# Altium PCB EMIA_HM1521_NETLIST_V1.0.pcbdoc (part 2 of 2)
Units mm, origin at the board's own origin, x right, y up, seen from the top; angles counter-clockwise.
Board outline 118 x 84.09 mm, 2 copper layers (Top Layer, Bottom Layer), stack 0.972 mm thick; 201 components, 147 nets, 642 pads, 379 vias.
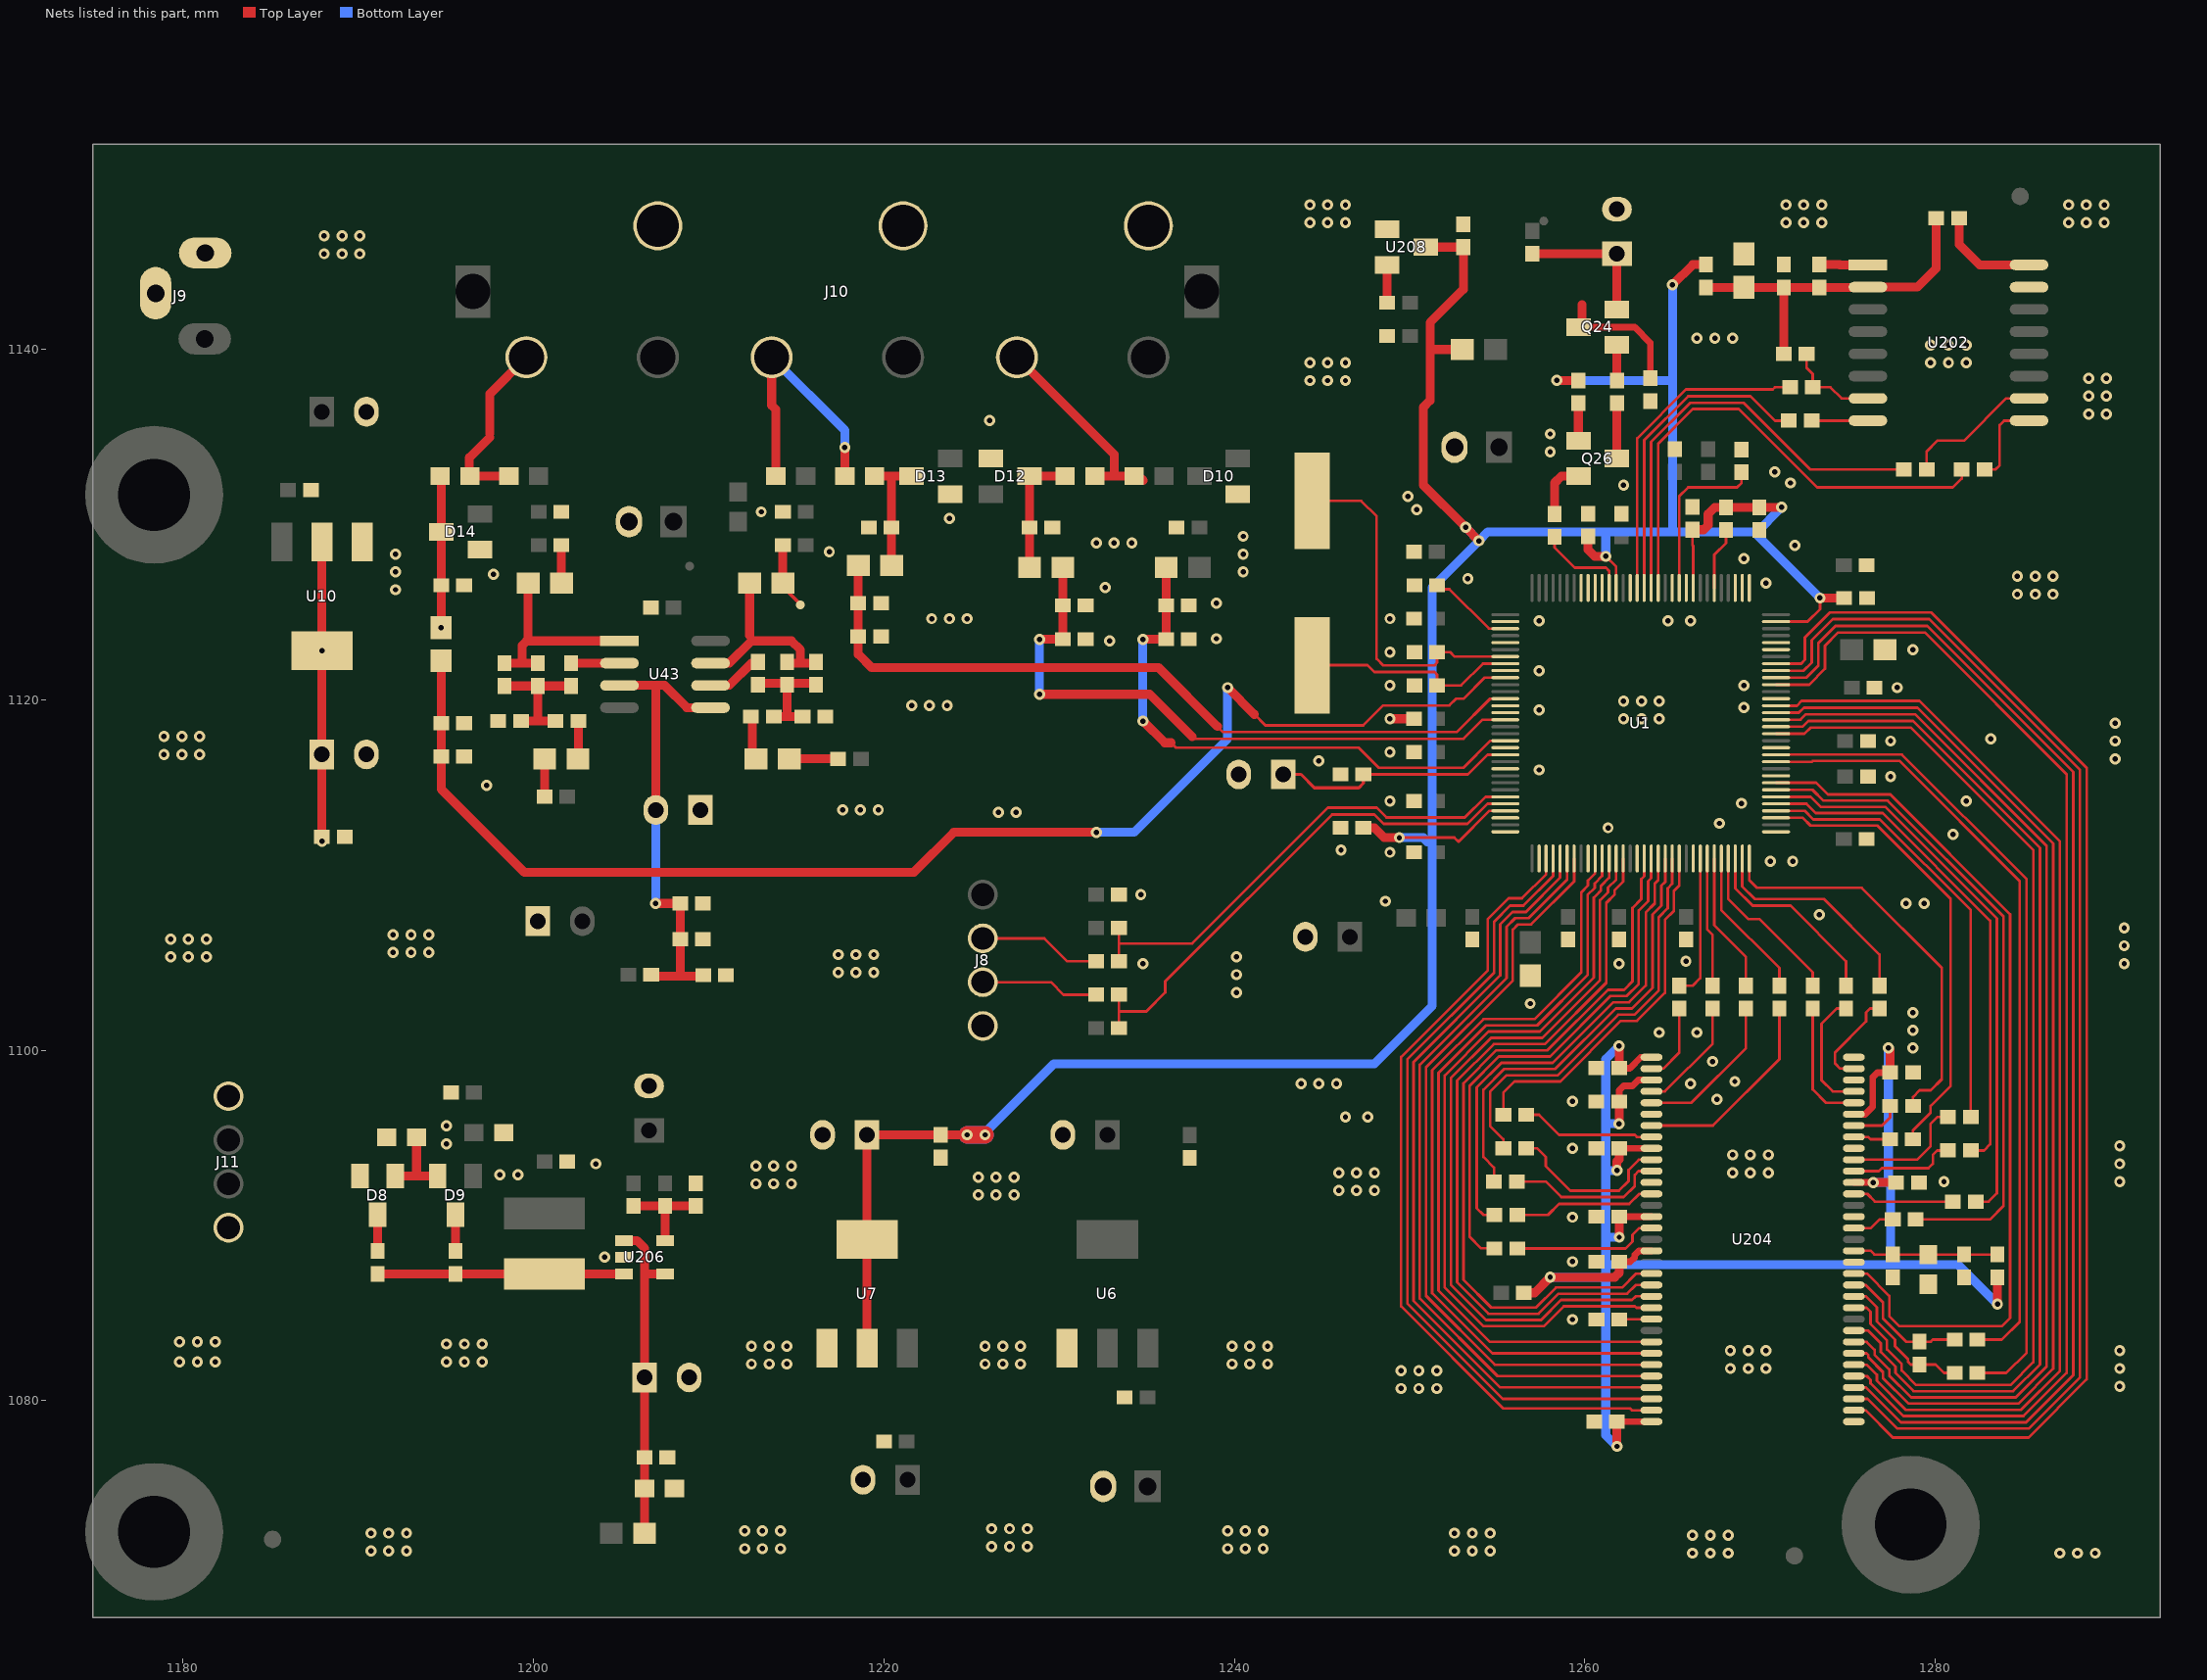
[diagram p2: the nets of this part, all layers, seen from the top]

## Via types
v1: diameter 0.635, hole 0.305, Top Layer to Bottom Layer, 379 vias

## Nets (pads, with @x,y where several pads share a name; then routed paths per layer and width w, separated by ;. In a path a pad name is that pad's centre, name@x,y a point inside that pad or via, vN(x,y) a via of type N, cw(c..) or ccw(c..) an arc to the next point about the centre after c; other vN are vias at no path point) (continued)
D3V3: C30.2 C35.2 C37.2 C40.2 C46.2 C59.2 C76.1 C98.1 L8.1 L17.1 R65.2 R139.2 U1.63 U1.73 U1.84 U1.125 U7.2 U7.4 U208.3 | length 178.2
  Top Layer w0.152: v1(1249.418,1112.136) 1252.557,1112.136 1252.791,1111.902 1254.554,1113.665 U1.125@1255.47,1113.665 ; v1(1261.204,1128.189) 1261.795,1127.598 U1.84@1261.795,1126.39 ; C35.2@1266.157,1129.708 1266.157,1128.824 1266.195,1128.786 U1.73@1266.195,1126.39 ; U1.63@1270.92,1124.465 1272.72,1124.465 1273.431,1125.177 v1(1273.431,1125.812)
  Top Layer w0.508: U7.2@1219.04,1082.975 C98.1@1219.04,1095.169 C76.1@1223.231,1095.169 v1(1224.755,1095.169) ; C46.2@1247.619,1112.695 1247.996,1112.695 1248.554,1112.136 v1(1249.418,1112.136) ; U208.3@1251.173,1145.842 C59.2@1253.076,1145.842 1253.076,1143.429 1251.171,1141.524 1251.171,1140 ; L17.1@1252.822,1140 1251.171,1140 ; v1(1253.965,1129.078) v1(1253.203,1129.84) 1250.79,1132.253 1250.79,1136.698 1251.171,1137.079 1251.171,1140 ; v1(1258.4,1138.227) R139.2@1259.639,1138.227 ; C30.2@1260.188,1129.327 1260.188,1128.57 1260.569,1128.189 v1(1261.204,1128.189) ; v1(1265.014,1143.683) 1266.174,1144.843 L8.1@1266.919,1144.843 ; C35.2@1266.157,1129.708 1266.787,1129.708 1267.046,1129.967 1267.046,1130.602 1267.431,1130.988 R65.2@1268.062,1130.988 C40.2@1269.967,1130.988 v1(1271.241,1130.988) ; v1(1273.431,1125.812) C37.2@1274.809,1125.812 C37.2@1274.877,1125.812
  Top Layer w1.016: v1(1224.755,1095.169) v1(1225.771,1095.169)
  Bottom Layer w0.178: 1261.29,1129.545 1261.331,1129.586
  Bottom Layer w0.508: v1@1225.644,1095.169 1229.708,1099.233 1247.996,1099.233 1251.298,1102.535 1251.298,1112.187 ; v1(1249.418,1112.136) 1250.779,1112.136 1251.013,1111.902 1251.298,1112.187 ; v1(1253.203,1129.84) v1(1253.965,1129.078) ; v1(1258.4,1138.227) 1265.014,1138.227 ; v1(1261.204,1128.189) 1261.204,1129.586 ; v1(1265.014,1143.683) 1265.014,1138.227 ; 1269.657,1129.586 1265.014,1129.586 ; v1(1271.241,1130.988) 1269.748,1129.495 v1(1273.431,1125.812) ; 1251.298,1112.187 1251.298,1126.411 v1(1253.965,1129.078) ; v1(1253.965,1129.078) 1254.473,1129.586 1261.204,1129.586 ; 1261.204,1129.586 1261.331,1129.586 1265.014,1129.586 ; 1265.014,1129.586 1265.014,1138.227
  Bottom Layer w1.016: v1(1224.755,1095.169) 1225.644,1095.169 v1(1225.771,1095.169)
D3V3_T: C83.1 C104.1 U10.2 U10.4 | length 16.8
  Top Layer w0.508: C83.1@1187.925,1112.187 U10.2@1187.925,1128.953
  other v1: 1187.925,1111.933 1187.925,1122.803
DDR_A0: U1.6 U204.29 | length 44.1
  Top Layer w0.152: U1.6@1258.995,1110.94 1258.995,1109.74 1256.794,1107.539 1256.032,1107.539 1255.539,1107.046 1255.539,1104.125 1250.586,1099.172 1250.586,1085.837 1255.023,1081.4 U204.29@1263.811,1081.4
DDR_A1: U1.5 U204.30 | length 44.8
  Top Layer w0.152: U1.5@1258.595,1110.94 1258.595,1109.842 1256.647,1107.894 1255.885,1107.894 1255.184,1107.193 1255.184,1104.272 1250.231,1099.319 1250.231,1085.69 1255.171,1080.75 U204.30@1263.811,1080.75
DDR_A2: U1.4 U204.31 | length 45.5
  Top Layer w0.152: U1.4@1258.195,1110.94 1258.195,1109.945 1256.5,1108.25 1255.738,1108.25 1254.828,1107.341 1254.828,1104.42 1249.875,1099.467 1249.875,1085.542 1255.318,1080.1 U204.31@1263.811,1080.1
DDR_A3: U1.3 U204.32 | length 46.2
  Top Layer w0.152: U1.3@1257.795,1110.94 1257.795,1110.048 1256.417,1108.671 1255.655,1108.671 1254.473,1107.488 1254.473,1104.567 1249.52,1099.614 1249.52,1085.39 1255.362,1079.548 1262.601,1079.548 1262.699,1079.45 U204.32@1263.811,1079.45
DDR_A4: U1.57 U204.35 | length 73.6
  Top Layer w0.152: U1.57@1270.92,1122.065 1272.356,1122.065 1272.573,1122.282 1272.573,1123.558 1274,1124.984 1279.79,1124.984 1288.65,1116.124 1288.65,1081.213 1285.334,1077.897 1277.587,1077.897 1276.034,1079.45 U204.35@1275.361,1079.45
DDR_A5: U1.56 U204.36 | length 72.4
  Top Layer w0.152: U1.56@1270.92,1121.665 1272.495,1121.665 1272.954,1122.124 1272.954,1123.4 1274.158,1124.603 1279.668,1124.603 1288.269,1116.002 1288.269,1081.335 1285.339,1078.405 1277.841,1078.405 1276.146,1080.1 U204.36@1275.361,1080.1
DDR_A6: U1.55 U204.37 | length 71.3
  Top Layer w0.152: U1.55@1270.92,1121.265 1272.656,1121.265 1273.335,1121.944 1273.335,1123.242 1274.315,1124.222 1279.546,1124.222 1287.888,1115.88 1287.888,1081.457 1285.191,1078.761 1278.041,1078.761 1276.051,1080.75 U204.37@1275.361,1080.75
DDR_A7: U1.54 U204.38 | length 70.3
  Top Layer w0.152: U1.54@1270.92,1120.865 1272.807,1120.865 1273.716,1121.774 1273.716,1123.084 1274.473,1123.841 1279.424,1123.841 1287.507,1115.758 1287.507,1081.579 1285.044,1079.116 1278.188,1079.116 1276.317,1080.988 1276.317,1081.188 1276.105,1081.4 U204.38@1275.361,1081.4
DDR_A8: U1.51 U204.39 | length 63.8
  Top Layer w0.152: U1.51@1270.92,1119.665 1272.111,1119.665 1272.38,1119.934 1279.111,1119.934 1287.126,1111.919 1287.126,1081.701 1284.897,1079.472 1278.335,1079.472 1276.672,1081.135 1276.672,1081.478 1276.101,1082.05 U204.39@1275.361,1082.05
DDR_A9: U1.50 U204.40 | length 62.8
  Top Layer w0.152: U1.50@1270.92,1119.265 1272.219,1119.265 1272.507,1119.553 1278.989,1119.553 1286.745,1111.797 1286.745,1081.823 1284.75,1079.827 1278.483,1079.827 1277.028,1081.282 1277.028,1081.626 1276.19,1082.464 1276.19,1082.596 1276.086,1082.7 U204.40@1275.361,1082.7
DDR_A10: U1.7 U204.28 | length 43.4
  Top Layer w0.152: U1.7@1259.395,1110.94 1259.395,1109.636 1256.941,1107.183 1256.2,1107.183 1255.895,1106.878 1255.895,1103.978 1250.942,1099.025 1250.942,1085.984 1254.876,1082.05 U204.28@1263.811,1082.05
DDR_A11: U1.49 U204.41 | length 61.5
  Top Layer w0.152: U1.49@1271.195,1118.865 1272.321,1118.865 1272.629,1119.172 1278.867,1119.172 1286.364,1111.675 1286.364,1081.945 1284.602,1080.183 1278.63,1080.183 1277.383,1081.43 1277.383,1081.773 1276.545,1082.611 1276.545,1082.895 1276.09,1083.35 U204.41@1275.361,1083.35
DDR_A12: U1.48 U204.42 | length 60.9
  Top Layer w0.152: U1.48@1270.92,1118.465 1272.435,1118.465 1272.761,1118.791 1278.745,1118.791 1285.983,1111.553 1285.983,1082.066 1284.455,1080.539 1278.777,1080.539 1277.739,1081.577 1277.739,1081.936 1276.901,1082.774 1276.901,1083.272 1276.173,1084 U204.42@1275.361,1084
DDR_BA0: U1.11 U204.26 | length 43.6
  Top Layer w0.152: U1.11@1260.995,1110.94 1260.995,1109.946 1260.569,1109.52 1260.569,1109.266 1260.162,1108.86 1260.162,1104.293 1257.287,1101.417 1254.366,1101.417 1251.653,1098.705 1251.653,1086.279 1254.582,1083.35 U204.26@1263.811,1083.35
DDR_BA1: U1.10 U204.27 | length 44.3
  Top Layer w0.152: U1.10@1260.595,1110.94 1260.595,1110.092 1260.188,1109.685 1260.188,1109.393 1259.807,1109.012 1259.807,1104.44 1257.14,1101.773 1254.219,1101.773 1251.298,1098.852 1251.298,1086.132 1254.729,1082.7 U204.27@1263.811,1082.7
DDR_CAS: U1.13 U204.22 | length 42.8
  Top Layer w0.152: U1.13@1261.795,1110.94 1261.795,1109.74 1261.331,1109.276 1261.331,1109.012 1260.873,1108.555 1260.873,1103.998 1257.582,1100.706 1254.661,1100.706 1252.364,1098.41 1252.364,1086.604 1254.366,1084.603 1257.512,1084.603 1258.655,1085.746 1262.702,1085.746 1262.907,1085.95 U204.22@1263.811,1085.95
DDR_CKE: U1.47 U204.44 | length 60.5
  Top Layer w0.152: U1.47@1270.92,1118.065 1272.543,1118.065 1272.888,1118.41 1278.623,1118.41 1285.602,1111.431 1285.602,1082.188 1284.308,1080.894 1278.925,1080.894 1278.095,1081.724 1278.095,1082.083 1277.256,1082.921 1277.256,1083.434 1276.317,1084.374 1276.317,1085.074 1276.09,1085.3 U204.44@1275.361,1085.3
DDR_CKN: R98.2 U1.43 | length 44.7
  Top Layer w0.152: U1.43@1270.92,1116.465 1272.975,1116.465 1273.027,1116.518 1277.955,1116.518 1284.826,1109.647 1284.826,1084.501 1283.81,1083.485 R98.2@1282.417,1083.485
DDR_CKP: R99.2 U1.44 | length 47.3
  Top Layer w0.152: U1.44@1271.195,1116.865 1271.203,1116.873 1278.107,1116.873 1285.221,1109.76 1285.221,1082.737 1284.064,1081.58 R99.2@1282.417,1081.58
DDR_D0: R68.2 U1.25 | length 8.2
  Top Layer w0.152: R68.2@1265.395,1103.683 1266.161,1103.683 1266.595,1104.116 U1.25@1266.595,1110.94
DDR_D1: R69.2 U1.26 | length 7.4
  Top Layer w0.152: U1.26@1266.995,1110.94 1266.995,1106.891 1267.3,1106.587 R69.2@1267.3,1103.683
DDR_D2: R70.2 U1.27 | length 8
  Top Layer w0.152: U1.27@1267.395,1110.94 1267.395,1107.139 1269.205,1105.329 R70.2@1269.205,1103.683
DDR_D3: R71.2 U1.28 | length 8.6
  Top Layer w0.152: U1.28@1267.795,1110.94 1267.795,1108.009 1271.11,1104.694 R71.2@1271.11,1103.683
DDR_D4: R67.2 U1.22 | length 20.9
  Top Layer w0.152: R67.2@1255.357,1096.312 1255.357,1097.577 1255.997,1098.217 1258.613,1098.217 1262.067,1101.672 1262.982,1101.672 1264.582,1103.272 1264.582,1107.447 1265.09,1107.955 1265.09,1109.088 1265.395,1109.393 U1.22@1265.395,1110.94
DDR_D5: R66.2 U1.21 | length 23.4
  Top Layer w0.152: R66.2@1255.357,1094.407 1255.357,1094.92 1254.6,1095.677 1254.6,1097.628 1255.544,1098.573 1258.465,1098.573 1261.92,1102.027 1262.834,1102.027 1264.226,1103.419 1264.226,1107.595 1264.734,1108.103 1264.734,1109.241 1264.995,1109.501 U1.21@1264.995,1110.94
DDR_D6: R62.2 U1.20 | length 25.2
  Top Layer w0.152: R62.2@1254.824,1092.502 1254.824,1093.294 1254.219,1093.899 1254.219,1097.75 1255.397,1098.928 1258.318,1098.928 1261.773,1102.383 1262.687,1102.383 1263.871,1103.566 1263.871,1107.742 1264.379,1108.25 1264.379,1109.393 1264.594,1109.608 1264.594,1110.939 U1.20@1264.595,1110.94
DDR_D7: R56.2 U1.19 | length 27.7
  Top Layer w0.152: R56.2@1254.849,1090.597 1254.219,1090.597 1253.838,1090.978 1253.838,1097.872 1255.25,1099.284 1258.171,1099.284 1261.625,1102.738 1262.54,1102.738 1263.49,1103.688 1263.49,1107.869 1263.998,1108.377 1263.998,1109.52 1264.195,1109.717 U1.19@1264.195,1110.94
DDR_D8: R79.2 U1.38 | length 32.6
  Top Layer w0.152: U1.38@1270.92,1114.465 1272.896,1114.465 1273.472,1113.889 1277.15,1113.889 1283.522,1107.516 1283.522,1091.834 1283.048,1091.359 R79.2@1282.316,1091.359
DDR_D9: R78.2 U1.37 | length 29
  Top Layer w0.152: U1.37@1270.92,1114.065 1272.661,1114.065 1273.192,1113.533 1277.002,1113.533 1283.145,1107.391 1283.145,1094.631 1282.794,1094.28 R78.2@1282.036,1094.28
DDR_D10: R77.2 U1.36 | length 25.3
  Top Layer w0.152: U1.36@1270.92,1113.665 1272.553,1113.665 1273.04,1113.178 1276.85,1113.178 1282.036,1107.991 R77.2@1282.036,1096.185
DDR_D11: R76.2 U1.35 | length 26.5
  Top Layer w0.152: U1.35@1270.92,1113.265 1272.445,1113.265 1272.888,1112.822 1276.698,1112.822 1280.889,1108.631 1280.889,1097.963 1279.746,1096.82 1279.746,1096.439 1278.73,1095.423 R76.2@1278.73,1094.915
DDR_D12: R75.2 U1.32 | length 23.2
  Top Layer w0.152: U1.32@1269.395,1110.94 1269.395,1109.711 1269.84,1109.266 1275.809,1109.266 1280.381,1104.694 1280.381,1098.344 1279.746,1097.709 1279.111,1097.709 1278.734,1097.333 R75.2@1278.734,1096.82
DDR_D13: R72.2 U1.29 | length 9.6
  Top Layer w0.152: U1.29@1268.195,1110.94 1268.195,1108.625 1269.332,1107.488 1269.967,1107.488 1273.015,1104.44 R72.2@1273.015,1103.683
DDR_D14: R73.2 U1.30 | length 11.1
  Top Layer w0.152: U1.30@1268.595,1110.94 1268.595,1109.241 1269.588,1108.248 1271.747,1108.248 1274.92,1105.075 R73.2@1274.92,1103.683
DDR_D15: R74.2 U1.31 | length 12.8
  Top Layer w0.152: U1.31@1268.995,1110.94 1268.995,1109.349 1269.713,1108.631 1273.65,1108.631 1276.825,1105.456 R74.2@1276.825,1103.683
DDR_DM0: U1.17 U204.20 | length 42.8
  Top Layer w0.152: U1.17@1263.395,1110.94 1263.395,1109.933 1263.236,1109.774 1263.236,1108.631 1262.728,1108.123 1262.728,1103.932 1262.245,1103.45 1261.331,1103.45 1257.876,1099.995 1254.955,1099.995 1253.076,1098.116 1253.076,1086.899 1254.661,1085.314 1257.217,1085.314 1258.36,1086.457 1262.143,1086.457 1262.937,1087.25 U204.20@1263.811,1087.25
DDR_DM1: U1.40 U204.47 | length 50.6
  Top Layer w0.152: U1.40@1270.92,1115.265 1273.212,1115.265 1273.877,1114.6 1277.444,1114.6 1284.284,1107.76 1284.284,1084.722 1283.81,1084.247 1277.957,1084.247 1277.383,1084.821 1277.383,1085.974 1276.108,1087.25 U204.47@1275.361,1087.25
DDR_DQS0: R100.2 U1.18 | length 29.5
  Top Layer w0.152: R100.2@1254.849,1088.692 1254.092,1088.692 1253.431,1089.352 1253.431,1097.968 1255.102,1099.639 1258.023,1099.639 1261.478,1103.094 1262.392,1103.094 1263.083,1103.785 1263.083,1107.976 1263.617,1108.509 1263.617,1109.647 1263.795,1109.825 U1.18@1263.795,1110.665
DDR_DQS1: R55.2 U1.39 | length 37.8
  Top Layer w0.152: U1.39@1270.92,1114.865 1272.999,1114.865 1273.619,1114.244 1277.297,1114.244 1283.903,1107.638 1283.903,1091.105 1283.141,1090.343 R55.2@1278.887,1090.343
DDR_RAS: U1.12 U204.23 | length 43.3
  Top Layer w0.152: U1.12@1261.395,1110.94 1261.395,1109.843 1260.924,1109.373 1260.924,1109.119 1260.823,1109.017 1260.823,1109.012 1260.518,1108.707 1260.518,1104.145 1257.434,1101.062 1254.513,1101.062 1252.009,1098.557 1252.009,1086.457 1254.219,1084.247 1257.659,1084.247 1258.802,1085.39 1262.855,1085.39 1262.945,1085.3 U204.23@1263.811,1085.3
DDR_WE: U1.14 U204.21 | length 42.3
  Top Layer w0.152: U1.14@1262.195,1110.94 1262.195,1109.622 1261.712,1109.139 1261.712,1108.89 1261.229,1108.408 1261.229,1103.851 1257.729,1100.351 1254.808,1100.351 1252.72,1098.263 1252.72,1086.751 1254.513,1084.958 1257.365,1084.958 1258.508,1086.101 1262.423,1086.101 1262.922,1086.6 U204.21@1263.811,1086.6
DR_CKN: R98.1 R109.2 U204.46 | length 7.7
  Top Layer w0.152: U204.46@1275.361,1086.6 1276.043,1086.6 1277.028,1085.615 1277.028,1084.674 1278.339,1083.363 R109.2@1279.111,1083.363 1279.75,1083.363 1279.873,1083.485 R98.1@1281.117,1083.485
DR_CKP: R99.1 R109.1 U204.45 | length 8.4
  Top Layer w0.152: U204.45@1275.361,1085.95 1276.053,1085.95 1276.672,1085.331 1276.672,1084.526 1277.714,1083.485 1277.714,1083.104 1278.45,1082.367 1278.45,1082.215 1278.603,1082.063 R109.1@1279.111,1082.063 1280.025,1082.063 1280.508,1081.58 R99.1@1281.117,1081.58
DR_D0: R68.1 U204.2 | length 4.5
  Top Layer w0.152: U204.2@1263.811,1098.95 1264.477,1098.95 1265.395,1099.868 R68.1@1265.395,1102.383
DR_D1: R69.1 U204.4 | length 6.6
  Top Layer w0.152: U204.4@1263.811,1097.65 1264.574,1097.65 1267.3,1100.376 R69.1@1267.3,1102.383
DR_D2: R70.1 U204.5 | length 9.2
  Top Layer w0.152: U204.5@1263.811,1097 1266.083,1097 1269.205,1100.122 R70.1@1269.205,1102.383 R70.1@1269.205,1102.674
DR_D3: R71.1 U204.7 | length 11.8
  Top Layer w0.152: U204.7@1263.811,1095.7 1267.323,1095.7 1271.11,1099.487 R71.1@1271.11,1102.383
DR_D4: R67.1 U204.8 | length 7.7
  Top Layer w0.152: R67.1@1256.657,1096.312 1257.394,1096.312 1258.537,1095.169 1262.855,1095.169 1262.974,1095.05 U204.8@1263.811,1095.05
DR_D5: R66.1 U204.10 | length 9.6
  Top Layer w0.152: R66.1@1256.657,1094.407 1257.267,1094.407 1257.775,1093.899 1257.775,1093.391 1259.184,1091.981 1261.953,1091.981 1262.499,1092.527 1262.499,1093.162 1263.087,1093.75 U204.10@1263.811,1093.75
DR_D6: R62.1 U204.11 | length 9
  Top Layer w0.152: R62.1@1256.124,1092.502 1257.775,1092.502 1258.664,1091.613 1262.22,1091.613 1262.855,1092.248 1262.855,1092.883 1263.072,1093.1 U204.11@1263.811,1093.1
DR_D7: R56.1 U204.13 | length 8.2
  Top Layer w0.152: R56.1@1256.149,1090.597 1257.902,1090.597 1258.537,1091.232 1262.541,1091.232 1263.109,1091.8 U204.13@1263.811,1091.8
DR_D8: R79.1 U204.54 | length 5.8
  Top Layer w0.152: U204.54@1275.361,1091.8 1276.13,1091.8 1276.571,1091.359 R79.1@1281.016,1091.359
DR_D9: R78.1 U204.56 | length 7.6
  Top Layer w0.152: R78.1@1280.736,1094.28 1280.127,1094.28 1279.873,1094.026 1279.873,1093.518 1279.619,1093.264 1276.952,1093.264 1276.788,1093.1 ; 1276.788,1093.1 U204.56@1275.361,1093.1 1276.788,1093.1
DR_D10: R77.1 U204.57 | length 7.1
  Top Layer w0.152: U204.57@1275.361,1093.75 1278.962,1093.75 1279.746,1094.534 1279.746,1095.804 1280.127,1096.185 R77.1@1280.736,1096.185
DR_D11: R76.1 U204.59 | length 2.1
  Top Layer w0.152: U204.59@1275.361,1095.05 1276.182,1095.05 1276.317,1094.915 R76.1@1277.43,1094.915
DR_D12: R75.1 U204.60 | length 2.9
  Top Layer w0.178: U204.60@1275.361,1095.7 1276.975,1095.7 1277.434,1096.16 R75.1@1277.434,1096.82
DR_D13: R72.1 U204.62 | length 7.3
  Top Layer w0.152: R72.1@1273.015,1102.383 1273.015,1097.762 1273.777,1097 U204.62@1275.361,1097
DR_D14: R73.1 U204.63 | length 7.1
  Top Layer w0.152: R73.1@1274.92,1102.383 1274.386,1102.383 1273.523,1101.519 1273.523,1098.285 1274.158,1097.65 U204.63@1275.361,1097.65
DR_D15: R74.1 U204.65 | length 5.7
  Top Layer w0.152: U204.65@1275.361,1098.95 1274.59,1098.95 1274.285,1099.255 1274.285,1099.868 1276.063,1101.646 1276.063,1102.154 1276.291,1102.383 R74.1@1276.825,1102.383
DR_DQS0: R100.1 U204.16 | length 8.4
  Top Layer w0.152: R100.1@1256.149,1088.679 1262.334,1088.679 1262.728,1089.073 1262.728,1089.454 1263.124,1089.85 U204.16@1263.811,1089.85
DR_DQS1: R55.1 U204.51 | length 2.4
  Top Layer w0.152: U204.51@1275.361,1089.85 1276.332,1089.85 1276.825,1090.343 R55.1@1277.587,1090.343
GND: C5.1 C6.1 C11.1 C13.2 C14.2 C15.1 C24.2 C25.2 C26.2 C27.2 C28.2 C29.1 C30.1 C31.1 C32.1 C33.1 C34.1 C35.1 C37.1 C38.1 C40.1 C41.1 C42.1 C43.1 C45.2 C46.1 C47.2 C49.2 C50.2 C53.1 C54.1 C55.1 C56.2 C57.1 C58.1 C59.1 C60.2 C61.1 C63.1 C64.1 C65.2 C67.1 C70.1 C71.2 C72.2 C73.1 C74.2 C75.1 C76.2 C78.2 C83.2 C84.1 C85.1 C86.1 C87.1 C88.1 C89.1 C90.1 C98.2 C99.2 C100.2 C101.2 C102.2 C104.2 C105.1 C107.1 C116.1 C117.1 C251.1 C270.2 C271.2 C273.1 C275.2 C276.2 C343.2 C1327.2 C1328.2 C1333.2 C1334.2 CE1.2 CE2.2 CE5.2 D8.2 D10.1 D12.1 D13.1 D14.1 J8.4 J9.2 J9.3 J10.3 J10.6 J10.9 J11.1 J11.4 R48.1 R54.1 R57.1 R59.1 R60.1 R64.2 R80.1 R83.2 R91.1 R117.1 R161.1 R181.1 R182.1 U1.2 U1.9 U1.16 U1.24 U1.33 U1.41 U1.45 U1.52 U1.65 U1.74 U1.76 U1.82 U1.98 U1.101 U1.105 U1.110 U1.111 U1.116 U1.119 U1.126 U1.128 U6.1 U7.1 U10.1 U202.15 U204.6 U204.12 U204.34 U204.48 U204.52 U204.58 U204.64 U204.66 U206.2 U208.1 | length 1.4
  Top Layer w0.508: v1(1248.885,1118.918) C57.1@1250.256,1118.918
  other v1: 1266.157,1071.293 1267.173,1071.293 1268.189,1071.293 1287.112,1071.293 1288.128,1071.293 1289.144,1071.293 1190.719,1071.42 1191.735,1071.42 1192.751,1071.42 1252.568,1071.42 1253.584,1071.42 1254.6,1071.42 1212.055,1071.547 1213.071,1071.547 1214.087,1071.547 1239.614,1071.547 1240.63,1071.547 1241.646,1071.547 1226.152,1071.674 1227.168,1071.674 1228.184,1071.674 1266.157,1072.309 1267.173,1072.309 1268.189,1072.309 1190.719,1072.436 1191.735,1072.436 1192.751,1072.436 1252.568,1072.436 1253.584,1072.436 1254.6,1072.436 1212.055,1072.563 1213.071,1072.563 1214.087,1072.563 1239.614,1072.563 1240.63,1072.563 1241.646,1072.563 1226.152,1072.69 1227.168,1072.69 1228.184,1072.69 1249.52,1080.691 1250.536,1080.691 1251.552,1080.691 1290.541,1080.818 1249.52,1081.707 1250.536,1081.707 1251.552,1081.707 1268.316,1081.834 1269.332,1081.834 1270.348,1081.834 1290.541,1081.834 1212.436,1082.088 1213.452,1082.088 1214.468,1082.088 1225.771,1082.088 1226.787,1082.088 1227.803,1082.088 1239.868,1082.088 1240.884,1082.088 1241.9,1082.088 1179.797,1082.215 1180.813,1082.215 1181.829,1082.215 1195.037,1082.215 1196.053,1082.215 1197.069,1082.215 1268.316,1082.85 1269.332,1082.85 1270.348,1082.85 1290.541,1082.85 1212.436,1083.104 1213.452,1083.104 1214.468,1083.104 1225.771,1083.104 1226.787,1083.104 1227.803,1083.104 1239.868,1083.104 1240.884,1083.104 1241.9,1083.104 1195.037,1083.231 1196.053,1083.231 1197.069,1083.231 1179.797,1083.358 1180.813,1083.358 1181.829,1083.358 1259.299,1084.628 1259.299,1087.93 1204.054,1088.184 1259.299,1090.47 1225.39,1091.74 1226.406,1091.74 1227.422,1091.74 1245.964,1091.994 1246.98,1091.994 1247.996,1091.994 1212.69,1092.375 1213.706,1092.375 1214.722,1092.375 1280.508,1092.502 1290.541,1092.502 1225.39,1092.756 1226.406,1092.756 1227.422,1092.756 1198.085,1092.883 1199.101,1092.883 1245.964,1093.01 1246.98,1093.01 1247.996,1093.01 1268.443,1093.01 1269.459,1093.01 1270.475,1093.01 1212.69,1093.391 1213.706,1093.391 1214.722,1093.391 1203.546,1093.518 1290.541,1093.518 1268.443,1094.026 1269.459,1094.026 1270.475,1094.026 1259.299,1094.407 1290.541,1094.534 1195.037,1094.661 1195.037,1095.677 1246.345,1096.185 1247.615,1096.185 1259.299,1097.074 1267.554,1097.201 1243.805,1098.09 1244.821,1098.09 1245.837,1098.09 1266.03,1098.09 1268.57,1098.217 1267.3,1099.36 1278.73,1100.122 1264.252,1101.011 1266.411,1101.011 1278.73,1101.138 1278.73,1102.154 1256.886,1102.662 1240.122,1103.297 1240.122,1104.313 1217.389,1104.44 1218.405,1104.44 1219.421,1104.44 1234.788,1104.948 1261.966,1104.948 1290.795,1104.948 1265.776,1105.075 1179.289,1105.329 1180.305,1105.329 1181.321,1105.329 1240.122,1105.329 1217.389,1105.456 1218.405,1105.456 1219.421,1105.456 1191.989,1105.583 1193.005,1105.583 1194.021,1105.583 1290.795,1105.964 1179.289,1106.345 1180.305,1106.345 1181.321,1106.345 1191.989,1106.599 1193.005,1106.599 1194.021,1106.599 1290.795,1106.98 1273.396,1107.742 1278.349,1108.377 1279.365,1108.377 1248.631,1108.504 1234.661,1108.885 1270.602,1110.79 1271.872,1110.79 1248.885,1111.298 1246.091,1111.425 1281.016,1112.314 1261.331,1112.695 1267.681,1112.949 1226.533,1113.584 1227.549,1113.584 1217.643,1113.711 1218.659,1113.711 1219.675,1113.711 1268.951,1114.092 1248.885,1114.219 1281.778,1114.219 1197.323,1115.108 1277.46,1115.616 1257.394,1115.997 1244.821,1116.505 1290.287,1116.632 1178.908,1116.886 1179.924,1116.886 1180.94,1116.886 1248.885,1117.013 1277.46,1117.648 1290.287,1117.648 1283.175,1117.775 1178.908,1117.902 1179.924,1117.902 1180.94,1117.902 1290.287,1118.664 1262.22,1118.918 1263.236,1118.918 1264.252,1118.918 1257.394,1119.426 1269.078,1119.553 1221.58,1119.68 1222.596,1119.68 1223.612,1119.68 1262.22,1119.934 1263.236,1119.934 1264.252,1119.934 1277.841,1120.696 1248.885,1120.823 1269.078,1120.823 1257.394,1121.665 1248.885,1122.728 1278.73,1122.855 1232.883,1123.363 1238.979,1123.49 1257.394,1124.506 1264.76,1124.506 1266.03,1124.506 1222.723,1124.633 1223.739,1124.633 1224.755,1124.633 1248.885,1124.633 1238.979,1125.522 1284.699,1126.03 1285.715,1126.03 1286.731,1126.03 1192.116,1126.284 1232.629,1126.411 1270.348,1126.665 1253.33,1126.919 1284.699,1127.046 1285.715,1127.046 1286.731,1127.046 1197.704,1127.173 1192.116,1127.3 1240.503,1127.3 1269.078,1128.062 1192.116,1128.316 1240.503,1128.316 1216.881,1128.443 1271.999,1128.824 1232.121,1128.951 1233.137,1128.951 1234.153,1128.951 1240.503,1129.332 1223.739,1130.348 1212.994,1130.729 1250.409,1130.856 1249.901,1131.618 1262.22,1132.253 1271.745,1132.38 1270.856,1133.015 1258.029,1134.158 1258.029,1135.174 1226.025,1135.936 1288.763,1136.317 1289.779,1136.317 1288.763,1137.333 1289.779,1137.333 1244.313,1138.222 1245.329,1138.222 1246.345,1138.222 1288.763,1138.349 1289.779,1138.349 1244.313,1139.238 1245.329,1139.238 1246.345,1139.238 1279.746,1139.238 1280.762,1139.238 1281.778,1139.238 1279.746,1140.254 1280.762,1140.254 1281.778,1140.254 1266.411,1140.635 1267.427,1140.635 1268.443,1140.635 1188.052,1145.461 1189.068,1145.461 1190.084,1145.461 1188.052,1146.477 1189.068,1146.477 1190.084,1146.477 1244.313,1147.239 1245.329,1147.239 1246.345,1147.239 1271.491,1147.239 1272.507,1147.239 1273.523,1147.239 1287.62,1147.239 1288.636,1147.239 1289.652,1147.239 1244.313,1148.255 1245.329,1148.255 1246.345,1148.255 1271.491,1148.255 1272.507,1148.255 1273.523,1148.255 1287.62,1148.255 1288.636,1148.255 1289.652,1148.255
GPIO14: R65.1 U1.70 | length 3.7
  Top Layer w0.152: U1.70@1267.395,1126.39 1267.395,1128.284 1268.062,1128.951 R65.1@1268.062,1129.688 R65.1@1267.909,1129.688
NetC6_2: C6.2 CE2.1 U1.117 | length 14.1
  Top Layer w0.152: C6.2@1247.365,1115.743 1253.33,1115.743 1254.452,1116.865 U1.117@1255.47,1116.865
  Top Layer w0.178: CE2.1@1242.789,1115.743 1243.805,1115.743 1244.567,1114.981 1247.107,1114.981 1247.365,1115.24 C6.2@1247.365,1115.743
NetC13_1: C13.1 U1.103 Y1.2 | length 20.5
  Top Layer w0.152: Y1.2@1244.44,1131.355 1247.243,1131.355 1248.123,1130.475 1248.123,1122.347 1248.504,1121.966 1251.425,1121.966 1251.577,1122.118 C13.1@1251.577,1122.728 1252.314,1122.728 1252.577,1122.465 U1.103@1255.47,1122.465
NetC14_1: C14.1 U1.104 Y1.1 | length 12.4
  Top Layer w0.152: Y1.1@1244.44,1121.975 1247.606,1121.975 1247.996,1121.585 1251.425,1121.585 1251.577,1121.433 C14.1@1251.577,1120.823 1252.949,1120.823 1254.191,1122.065 U1.104@1255.47,1122.065
NetC15_2: C15.2 C18.1 R86.1 R96.1 R184.2 | length 8
  Top Layer w0.508: C18.1@1198.339,1120.793 R96.1@1200.246,1120.793 ; C15.2@1199.232,1118.791 C15.2@1199.283,1118.791 1200.246,1118.791 ; R86.1@1201.26,1118.791 1200.246,1118.791 ; R184.2@1202.276,1120.793 R184.2@1202.149,1120.793 R96.1@1200.246,1120.793 ; 1200.246,1118.791 R96.1@1200.246,1120.793
NetC17_1: C17.1 C75.2 R85.2 R95.1 R183.1 | length 6.9
  Top Layer w0.508: R183.1@1212.817,1120.95 R95.1@1214.468,1120.95 ; R85.2@1213.642,1119.045 C75.2@1215.42,1119.045 ; 1214.468,1119.109 R95.1@1214.468,1120.95 ; C17.1@1216.119,1120.951 1216.118,1120.95 R95.1@1214.468,1120.95
NetC17_2: C17.2 C94.1 R95.2 U43.7 | length 11.1
  Top Layer w0.508: U43.7@1210.277,1122.093 1211.166,1122.093 1212.436,1123.363 1214.722,1123.363 1215.23,1122.855 1215.23,1122.093 ; 1212.333,1123.68 C94.1@1212.333,1126.665 ; R95.2@1214.468,1122.093 1215.23,1122.093 ; C17.2@1216.119,1122.094 1216.118,1122.093 1215.23,1122.093
NetC18_2: C18.2 C95.1 R96.2 U43.1 | length 11.4
  Top Layer w0.508: C18.2@1198.339,1122.093 1199.355,1122.093 ; C95.1@1199.693,1126.665 1199.693,1123.363 ; R96.2@1199.99,1122.093 1199.355,1122.093 ; U43.1@1204.727,1123.363 1199.693,1123.363 ; 1199.355,1122.093 1199.355,1123.109 1199.609,1123.363 1199.693,1123.363
NetC56_1: C56.1 D8.1 D9.2 | length 4.6
  Top Layer w0.508: D8.1@1192.116,1092.824 1193.322,1092.824 ; C56.1@1193.322,1095.026 1193.322,1092.824 ; D9.2@1194.529,1092.824 1193.322,1092.824
NetC91_1: C91.1 R189.2 | length 2.7
  Top Layer w0.508: C91.1@1214.785,1116.632 R189.2@1217.452,1116.632
NetC91_2: C91.2 R85.1 | length 2.4
  Top Layer w0.508: C91.2@1212.499,1116.632 R85.1@1212.499,1119.045
NetC92_1: C92.1 R190.1 | length 2.2
  Top Layer w0.508: R190.1@1200.63,1114.473 C92.1@1200.63,1116.632
NetC92_2: C92.2 R86.2 | length 2.2
  Top Layer w0.508: C92.2@1202.56,1116.632 R86.2@1202.56,1118.791
NetC94_2: C94.2 pad.TP1@1215.23,1125.42 R111.2 | length 3.2
  Top Layer w0.2: C94.2@1214.502,1126.182 pad.TP1@1215.264,1125.42
  Top Layer w0.508: C94.2@1214.233,1126.665 R111.2@1214.233,1128.824
NetC95_2: C95.2 R112.2 | length 2.2
  Top Layer w0.508: C95.2@1201.593,1126.665 R112.2@1201.593,1128.824
NetC116_2: C116.2 C117.2 R90.1 R91.2 U204.49 | length 8.3
  Top Layer w0.152: U204.49@1275.361,1088.55 1276.332,1088.55 1276.541,1088.341 C116.2@1277.587,1088.341 C117.2@1279.619,1088.341 R91.2@1281.651,1088.341 R90.1@1283.556,1088.341
NetC270_1: C270.1 C271.1 C276.1 FB3.2 U206.1 U206.4 | length 18.8
  Top Layer w0.508: U206.1@1205.165,1089.134 1205.898,1089.134 1206.34,1088.692 1206.34,1087.234 ; FB3.2@1206.34,1072.436 C270.1@1206.34,1074.976 C271.1@1206.34,1076.754 1206.34,1087.234 ; U206.4@1207.515,1087.234 1206.34,1087.234
NetC272_1: C272.1 R114.2 R117.2 U206.5 | length 5.5
  Top Layer w0.508: R114.2@1205.705,1091.105 R117.2@1209.261,1091.105 ; U206.5@1207.515,1089.134 C272.1@1207.515,1091.105
NetC1333_1: C1333.1 L10.2 Q24.2 | length 8
  Top Layer w0.508: L10.2@1257.013,1145.461 C1333.1@1261.839,1145.461 Q24.2@1261.839,1142.286
NetC1340_1: C1340.1 C1341.1 L38.1 U206.3 | length 14.1
  Top Layer w0.508: C1341.1@1191.1,1087.234 C1340.1@1195.545,1087.234 U206.3@1205.165,1087.234
NetC1340_2: C1340.2 D9.3 | length 2.1
  Top Layer w0.508: C1340.2@1195.545,1088.534 D9.3@1195.545,1090.624
NetC1341_2: C1341.2 D8.3 | length 2.1
  Top Layer w0.508: C1341.2@1191.1,1088.534 D8.3@1191.1,1090.624
NetJ8_2: J8.2 R106.1 | length 7.1
  Top Layer w0.152: J8.2@1225.644,1106.385 1229.16,1106.385 1230.47,1105.075 R106.1@1232.116,1105.075 R106.1@1232.184,1105.075
NetJ8_3: J8.3 R105.2 | length 6.8
  Top Layer w0.152: J8.3@1225.644,1103.885 1229.534,1103.885 1230.249,1103.17 R105.2@1232.116,1103.17 R105.2@1232.184,1103.17
NetJ10_1: J10.1 R133.1 R134.1 | length 10.6
  Top Layer w0.254: R134.1@1198.593,1132.761 R134.1@1198.974,1132.761
  Top Layer w0.508: 1197.506,1134.991 1196.332,1133.817 1196.332,1132.776 1198.578,1132.776 R134.1@1198.593,1132.761 ; 1197.506,1135.199 1197.506,1137.466 J10.1@1199.594,1139.554
NetJ10_4: J10.4 R131.1 R132.1 | length 15.4
  Top Layer w0.508: J10.4@1213.594,1139.554 1213.594,1136.81 1213.833,1136.571 R132.1@1213.833,1132.761 ; R131.1@1217.77,1132.761 v1(1217.77,1134.412)
  Bottom Layer w0.508: J10.4@1213.594,1139.554 1217.77,1135.378 v1(1217.77,1134.412)
NetJ10_7: J10.7 R129.1 R130.1 | length 11.9
  Top Layer w0.508: J10.7@1227.594,1139.554 1233.137,1134.011 1233.137,1132.761 ; R129.1@1232.043,1132.761 1233.137,1132.761 ; R130.1@1234.799,1132.529 1234.567,1132.761 R130.1@1234.28,1132.761 1233.137,1132.761
NetQ24_1: Q24.1 R158.2 | length 1.8
  Top Layer w0.508: R158.2@1261.839,1138.159 Q24.1@1261.839,1140
NetQ26_1: Q26.1 R139.1 | length 2.1
  Top Layer w0.508: Q26.1@1259.639,1134.793 R139.1@1259.639,1136.927
NetQ26_2: Q26.2 R142.2 | length 3.3
  Top Layer w0.508: R142.2@1258.283,1130.607 1258.283,1132.38 1258.664,1132.761 Q26.2@1259.639,1132.761
NetQ26_3: Q26.3 R158.1 | length 3.1
  Top Layer w0.508: Q26.3@1261.839,1133.777 R158.1@1261.839,1136.927
NetR63_1: R63.1 U208.2 | length 1.8
  Top Layer w0.508: R63.1@1248.726,1143.048 U208.2@1248.726,1144.826
NetR64_1: R64.1 U1.99 | length 4.9
  Top Layer w0.152: R64.1@1251.489,1126.317 1252.281,1126.317 1254.533,1124.065 U1.99@1255.47,1124.065
NetR80_2: R80.2 U204.24 | length 2
  Top Layer w0.152: R80.2@1261.842,1084.628 R80.2@1261.97,1084.628 1261.992,1084.65 U204.24@1263.811,1084.65
NetR83_1: R83.1 U1.75 | length 9.7
  Top Layer w0.152: U1.75@1265.395,1126.39 1265.395,1131.618 1265.903,1132.126 1268.697,1132.126 1268.951,1132.38 R83.1@1268.951,1132.99
NetR183_2: R183.2 U43.6 | length 3.1
  Top Layer w0.508: U43.6@1210.277,1120.823 1211.166,1120.823 1212.436,1122.093 R183.2@1212.817,1122.093
NetR184_1: R184.1 U43.2 | length 2.6
  Top Layer w0.508: R184.1@1202.149,1122.093 U43.2@1204.727,1122.093
Pb: C49.1 D13.3 L3.2 R131.2 | length 7.2
  Top Layer w0.508: R131.2@1219.47,1132.761 1220.437,1132.761 ; L3.2@1220.437,1127.681 C49.1@1220.437,1129.84 1220.437,1132.761 ; D13.3@1221.58,1132.761 1220.437,1132.761
Pr: C101.1 D14.3 L4.2 R133.2 | length 8.8
  Top Layer w0.508: L4.2@1194.734,1123.932 v1(1194.734,1124.125) C101.1@1194.734,1126.538 R133.2@1194.734,1132.761
PWR_DRAM: C84.2 C85.2 C86.2 C87.2 C88.2 C89.2 C90.2 C105.2 L18.1 R90.2 U204.1 U204.3 U204.9 U204.15 U204.18 U204.33 U204.55 U204.61 | length 100.6
  Top Layer w0.381: C89.2@1261.839,1078.8 U204.33@1263.811,1078.8 ; C86.2@1261.855,1090.5 C86.2@1261.97,1090.5 U204.15@1263.811,1090.5 ; C85.2@1261.966,1097.074 1261.966,1097.709 1262.22,1097.963 1262.728,1097.963 1263.065,1098.3 U204.3@1263.811,1098.3 ; C84.2@1261.966,1098.979 1262.575,1098.979 1263.196,1099.6 U204.1@1263.811,1099.6 ; C88.2@1261.97,1087.93 1262.601,1087.93 1262.855,1088.184 1262.855,1088.311 1263.094,1088.55 U204.18@1263.811,1088.55 ; C87.2@1261.97,1094.407 1261.97,1094.4 U204.9@1263.811,1094.4 ; U204.55@1275.361,1092.45 v1(1276.469,1092.45) ; U204.61@1275.361,1096.35 1276.008,1096.35 1276.444,1096.786 1276.444,1098.459 1276.709,1098.725 C105.2@1277.434,1098.725
  Top Layer w0.508: L18.1@1256.53,1086.152 1257.14,1086.152 v1(1258.029,1087.041) 1261.712,1087.041 1261.97,1087.3 C88.2@1261.97,1087.93 ; v1(1261.839,1077.389) C89.2@1261.839,1078.8 ; v1(1261.839,1093.137) 1261.839,1093.645 1261.97,1093.777 C87.2@1261.97,1094.4 ; v1(1261.966,1095.804) C85.2@1261.966,1097.074 ; C84.2@1261.966,1098.979 v1(1261.966,1100.249) ; v1(1261.97,1089.327) C86.2@1261.97,1090.5 ; v1(1276.469,1092.45) C90.2@1277.773,1092.45 ; v1(1277.333,1100.122) 1277.434,1100.02 C105.2@1277.434,1098.725 ; v1(1283.556,1085.517) R90.2@1283.556,1087.041
  Bottom Layer w0.508: v1(1258.029,1087.041) 1261.204,1087.041 ; v1(1261.839,1077.389) 1261.204,1078.024 1261.204,1087.041 ; v1(1261.839,1093.137) 1261.204,1093.137 ; v1(1261.966,1095.804) 1261.204,1095.804 ; v1(1261.966,1100.249) 1261.204,1099.487 1261.204,1095.804 ; v1(1261.97,1089.327) 1261.204,1089.327 ; v1(1276.469,1092.45) 1277.46,1092.45 ; v1(1277.333,1100.122) 1277.333,1092.577 1277.46,1092.45 ; v1(1283.556,1085.517) 1281.319,1087.754 1277.46,1087.754 ; 1261.204,1087.041 1261.204,1087.754 ; 1261.204,1087.754 1277.46,1087.754 ; 1261.204,1087.754 1261.204,1089.327 ; 1261.204,1089.327 1261.204,1093.137 ; 1261.204,1093.137 1261.204,1095.804 ; 1277.46,1087.754 1277.46,1092.45
RXD: R103.2 R106.2 U1.123 | length 27.9
  Top Layer w0.152: R106.2@1233.416,1105.075 1233.416,1106.091 ; R103.2@1233.416,1106.98 1233.416,1106.091 ; U1.123@1255.47,1114.465 1254.338,1114.465 1253.152,1113.279 1248.681,1113.279 1248.123,1113.838 1245.334,1113.838 1237.587,1106.091 1233.416,1106.091
S_/CS: R28.1 U1.81 | length 18.5
  Top Layer w0.152: U1.81@1262.995,1126.39 1262.995,1134.933 1265.776,1137.714 1270.729,1137.714 1270.856,1137.841 R28.1@1271.719,1137.841
S_CLK: R24.2 U1.78 | length 28.9
  Top Layer w0.152: U1.78@1264.195,1126.39 1264.195,1134.619 1266.172,1136.596 1268.798,1136.596 1273.269,1132.126 1281.016,1132.126 1281.524,1132.634 R24.2@1281.524,1133.142
S_SI: R29.1 U1.80 | length 18.3
  Top Layer w0.152: U1.80@1263.395,1126.39 1263.395,1134.825 1265.903,1137.333 1269.459,1137.333 1270.856,1135.936 R29.1@1271.656,1135.936
S_SO: R25.2 U1.79 | length 25.3
  Top Layer w0.152: U1.79@1263.795,1126.39 1263.795,1134.722 1266.025,1136.952 1269.078,1136.952 1272.888,1133.142 R25.2@1278.285,1133.142
SC_CLK: U1.87
SC_DETECT: U1.89
SC_IO: U1.88
SC_RST: U1.86
SC_VCC: Q24.3 R161.2 | length 7.8
  Top Layer w0.381: Q24.3@1259.639,1141.27 1259.857,1141.27 1262.855,1141.27 1263.744,1140.381 R161.2@1263.744,1138.354 R161.2@1263.744,1138.227
  Top Layer w0.508: Q24.3@1259.857,1141.422 1259.857,1142.565
SC_VCCEN: R142.1 U1.85 | length 5.4
  Top Layer w0.152: R142.1@1258.283,1129.434 R142.1@1258.283,1129.307 1258.283,1128.697 1259.438,1127.541 1261.216,1127.541 1261.395,1127.363 U1.85@1261.395,1126.39
SCL: U1.66
SDA: U1.67
SFCLK: R24.1 U202.9 | length 5
  Top Layer w0.152: R24.1@1282.824,1133.142 1283.429,1133.142 1283.683,1133.396 1283.683,1135.682 1283.937,1135.936 U202.9@1285.362,1135.936
SFCS: R28.2 R37.2 U202.7 | length 5.5
  Top Layer w0.152: R37.2@1272.664,1139.746 1272.664,1138.954 1273.019,1138.598 R28.2@1273.019,1137.841 1274.031,1137.841 1274.666,1137.206 U202.7@1276.162,1137.206
SFHOLD: R27.2 U202.1 | length 2.8
  Top Layer w0.508: R27.2@1273.396,1144.843 1274.556,1144.843 1274.539,1144.826 U202.1@1276.162,1144.826
SFSI: R25.1 U202.10 | length 8.1
  Top Layer w0.152: R25.1@1279.517,1133.142 1279.517,1134.183 1280.127,1134.793 1281.651,1134.793 1284.064,1137.206 U202.10@1285.362,1137.206
SFSO: R29.2 U202.8 | length 3.1
  Top Layer w0.152: R29.2@1272.956,1135.936 U202.8@1276.087,1135.936
SFVCC: C251.2 CE1.1 L8.2 R27.1 R35.1 R37.1 U202.2 | length 20.3
  Top Layer w0.508: L8.2@1266.919,1143.543 CE1.1@1269.078,1143.543 C251.2@1271.364,1143.543 ; R37.1@1271.364,1139.746 C251.2@1271.364,1143.543 ; R35.1@1280.063,1147.493 1280.063,1144.636 1278.984,1143.556 1276.087,1143.556 1276.074,1143.543 R27.1@1273.396,1143.543 C251.2@1271.364,1143.543
SFWP: R35.2 U202.16 | length 6
  Top Layer w0.508: R35.2@1281.363,1147.493 1281.363,1146.002 1282.54,1144.826 U202.16@1285.362,1144.826
SPI1_CLK: U1.59
SPI1_IO0: U1.60
TXD: R105.1 R180.1 U1.124 | length 29.7
  Top Layer w0.152: R180.1@1233.416,1101.265 1233.416,1102.217 ; R105.1@1233.416,1103.17 1233.416,1102.217 ; U1.124@1255.47,1114.065 1254.451,1114.065 1253.309,1112.924 1248.529,1112.924 1247.996,1113.457 1245.582,1113.457 1236.058,1103.933 1236.058,1103.297 1234.978,1102.217 1233.416,1102.217
V_DAC0: C24.1 L1.1 R54.2 U1.115 | length 32.6
  Top Layer w0.152: 1236.388,1117.546 1236.667,1117.267 1247.092,1117.267 1248.235,1116.124 1253.076,1116.124 1254.617,1117.665 U1.115@1255.47,1117.665
  Top Layer w0.508: v1(1234.775,1123.457) R54.2@1236.106,1123.457 C24.1@1236.106,1125.395 L1.1@1236.106,1127.554 ; v1(1234.788,1118.791) 1236.032,1117.546 1236.388,1117.546
  Bottom Layer w0.508: v1@1234.754,1118.824 v1@1234.775,1118.804 ; v1@1234.775,1118.791 v1@1234.775,1118.804 ; v1(1234.775,1123.457) v1@1234.775,1118.804 ; v1(1234.788,1118.791) v1@1234.775,1118.804
V_DAC1: C26.1 L2.1 R57.2 U1.112 | length 36.7
  Top Layer w0.152: 1237.582,1117.902 1237.709,1117.775 1253.076,1117.775 1254.166,1118.865 U1.112@1255.47,1118.865
  Top Layer w0.508: v1(1228.88,1120.315) 1235.169,1120.315 1237.582,1117.902 ; v1(1228.88,1123.457) R57.2@1230.211,1123.457 C26.1@1230.211,1125.395 L2.1@1230.211,1127.554
  Bottom Layer w0.508: v1(1228.88,1120.315) v1(1228.88,1123.457)
V_DAC2: C47.1 L3.1 R59.2 U1.109 | length 44.5
  Top Layer w0.152: 1239.042,1118.473 1239.36,1118.156 1252.695,1118.156 1254.604,1120.065 U1.109@1255.47,1120.065
  Top Layer w0.508: 1218.532,1122.601 1219.294,1121.839 1235.677,1121.839 1239.042,1118.473 ; 1218.537,1122.728 R59.2@1218.537,1123.617 C47.1@1218.537,1125.522 L3.1@1218.537,1127.681
V_DAC3: C50.1 L4.1 R60.2 U1.106 | length 78.1
  Top Layer w0.152: 1241.138,1119.172 1241.773,1118.537 1247.361,1118.537 1248.504,1119.68 1252.268,1119.68 1252.649,1120.061 1253.076,1120.061 1254.28,1121.265 U1.106@1255.47,1121.265
  Top Layer w0.508: L4.1@1194.734,1122.225 R60.2@1194.734,1118.669 C50.1@1194.734,1116.764 1194.734,1114.903 1199.482,1110.155 1221.707,1110.155 1223.993,1112.441 v1(1232.121,1112.441) ; v1(1239.614,1120.696) 1241.138,1119.172
  Bottom Layer w0.508: v1(1232.121,1112.441) 1234.28,1112.441 1239.614,1117.775 v1(1239.614,1120.696)
Vref: C27.1 C28.1 C34.2 R47.1 R48.2 U43.3 U43.5 | length 28.5
  Top Layer w0.508: U43.3@1204.727,1120.823 1207.483,1120.823 1208.753,1119.553 U43.5@1210.277,1119.553 ; R47.1@1206.746,1104.237 R48.2@1209.286,1104.237 ; v1(1206.975,1108.377) C28.1@1208.372,1108.377 1208.372,1104.262 C27.1@1208.372,1106.202 ; C34.2@1206.975,1113.711 1206.975,1120.823
  Bottom Layer w0.508: v1(1206.975,1108.377) C34.2@1206.975,1113.711
Y: C45.1 D12.3 L2.2 R129.2 | length 7.2
  Top Layer w0.508: L2.2@1228.311,1127.554 C45.1@1228.311,1129.84 D12.3@1228.311,1132.761 R129.2@1230.343,1132.761
pads on no net: J10.Hole M1.1 M2.1 M3.1 MI1.MI MI2.MI MI3.MI U1.58 U1.61 U1.62 U1.68 U1.69 U1.71 U1.72 U1.90 U1.91 U1.92 U1.93 U1.94 U1.95 U1.96 U1.122 U202.3 U202.4 U202.5 U202.6 U202.11 U202.12 U202.13 U202.14 U204.14 U204.17 U204.19 U204.25 U204.43 U204.50 U204.53

## Polygon pours and split planes (outlines as drawn)
GND on Bottom Layer "GND_L02_P002" (solid, remove dead copper, pour order 2): 1172.177,1154.351 1295.494,1154.351 1295.621,1154.478 1295.748,1154.351 1295.748,1065.451 1171.669,1065.451
GND on Top Layer "GND_L01_P000" (solid, remove dead copper, pour order 0): 1171.669,1154.503 1294.986,1154.503 1295.113,1154.63 1295.24,1154.503 1295.24,1065.603 1171.161,1065.603

## Keep-outs
Keep-Out Layer:
  the board outline again, w0.203

## Silkscreen, mask and mechanical layers (free items; w line width, h text height)
Top Overlay:
  lines w0.178: 1190.338,1119.934 1193.767,1119.934 1195.926,1119.934 1197.069,1121.077 ; 1197.069,1120.315 1197.069,1122.474 ; 1201.514,1132.38 1203.673,1132.38 ; 1202.657,1128.443 1202.657,1129.713 1202.657,1131.11 1202.784,1131.237 1202.784,1132.38 ; 1203.165,1114.981 1203.927,1114.981 ; 1203.546,1118.156 1203.546,1118.664 ; 1203.546,1119.299 1203.546,1118.664 ; 1203.602,1115.037 1204.054,1115.489 1204.054,1118.156 1203.546,1118.664

## Text inside footprints (layer, text, board x,y; h text height)
U1: Mechanical 13 "EMIA_20210812_V1.0" at 1239.741,1074.595 h1.02